# EAGLE board FT-991A_PAT (EAGLE 9.3.0)
REVISION_ID: U
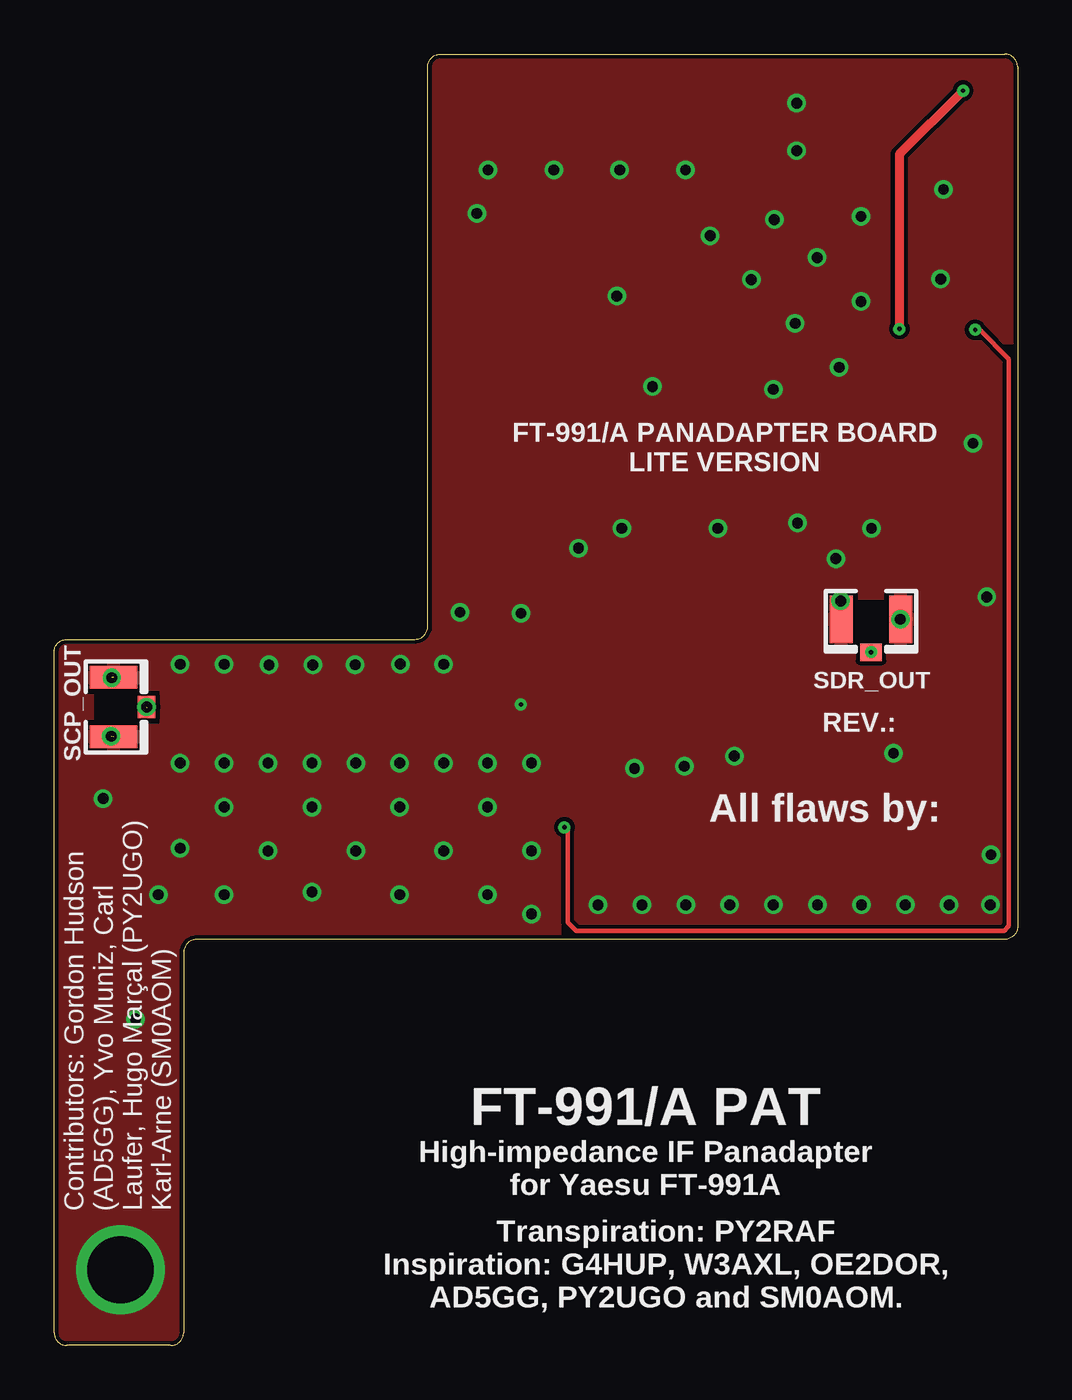
[diagram p0: board, top side]
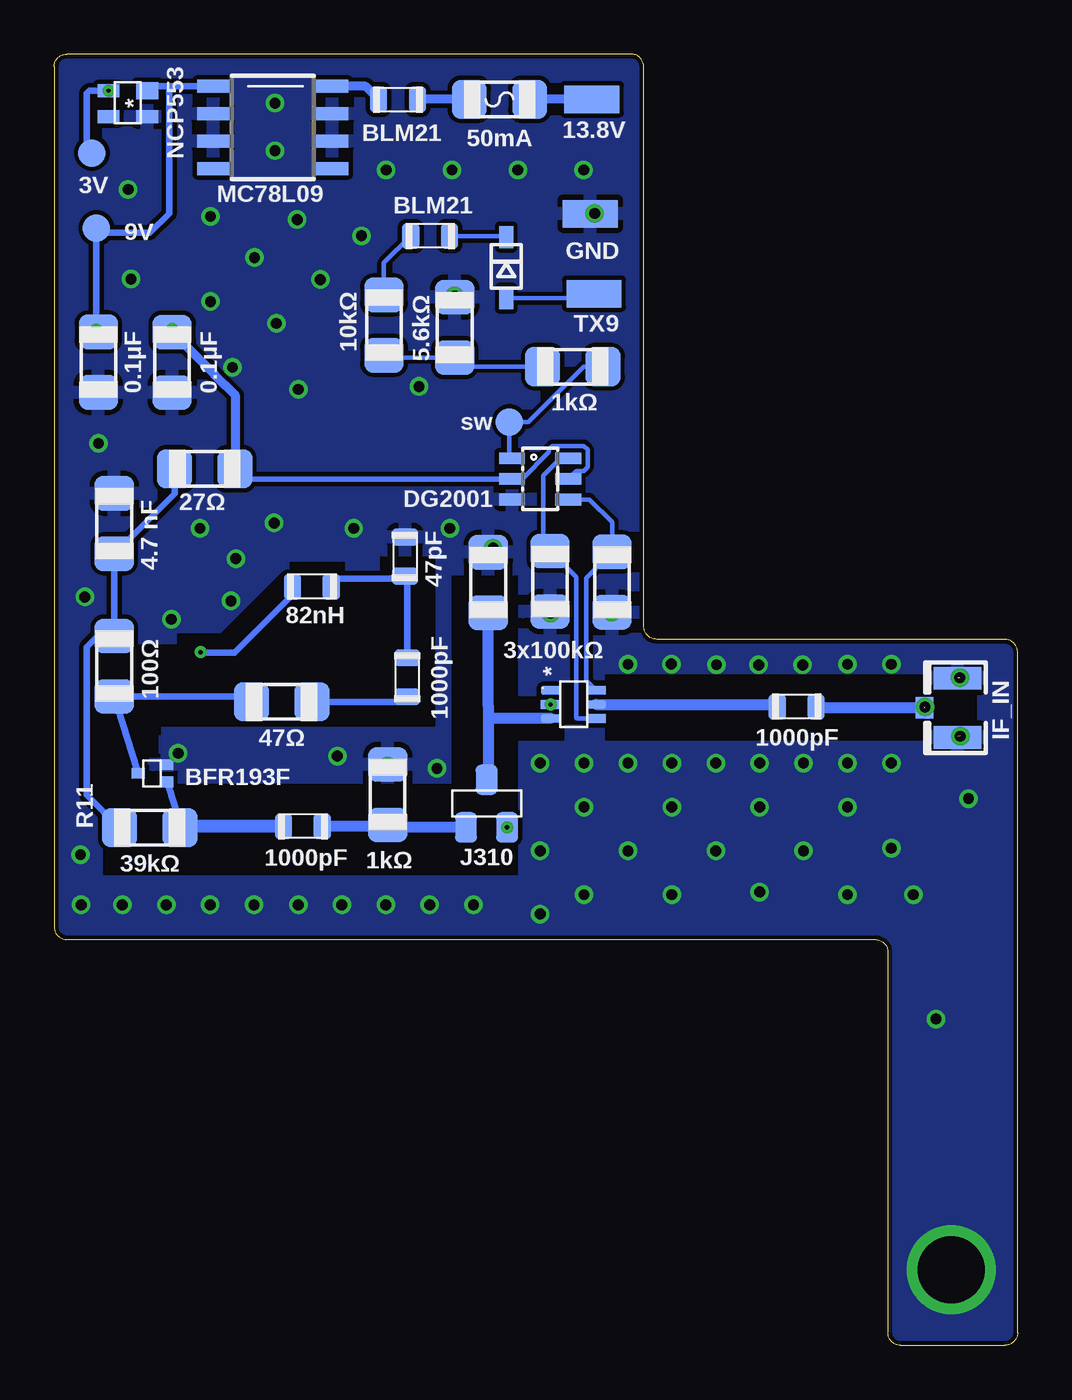
[diagram p1: board, bottom side, seen from below]

Size 44.6 x 59.8 mm. Coordinates in mm from the lower left corner, seen from the top.
Outline: 0,0.6 0,32.1 arc-90 0.6,32.7 16.7,32.7 arc90 17.3,33.3 17.3,59.2 arc-90 17.9,59.8 44,59.8 arc-90 44.6,59.2 44.6,19.4 arc-90 44,18.8 6.6,18.8 arc90 6,18.2 6,0.6 arc-90 5.4,0 0.6,0 arc-90 0,0.6
Copper layers (1*16): Top 0.0356mm / dielectric 1.6mm / Bottom 0.0356mm
Design rules "LaenPCBOrder *": minimum track width 5mil, minimum drill 0.2mm, track to track 8mil, track to pad 8mil, pad to pad 8mil, via to via 8mil, smd to smd 8mil, copper to edge 0.2mm, drill to drill 0.2mm, minimum pad ring 7mil, minimum via ring 7mil, stop-mask expansion 3mil, vias tented up to drill 10mil, thermal gap 10mil
tRestrict: area 3.7,28.8 to 4.9,30.3
bRestrict: area 3.7,28.8 to 4.9,30.3; area 23.1,21.8 to 42.3,26; area 23.1,25.9 to 26.2,35.6; area 21,28 to 23.5,30.1; area 4.1,28 to 19.1,31.1; area 27,28.7 to 29.5,30.7; area 27,30.8 to 29.5,32.8; area 27,32.8 to 29.5,34.9; area 27,34.5 to 29.5,36.5; area 31.1,34.2 to 33.7,36.3; area 32.7,32.5 to 35.9,35.7; area 33.9,31.2 to 37.2,34.5; 8 more areas; 1 lines

## Footprints (pad centres in the part's own frame; a part is rotated, then mirrored left to right if it is on the bottom)
SMD1,27-2,54 = smd 1.27 x 2.54: 1 0,0
0805 = smd 0.8 x 1.2: P$1 -0.9,0; P$2 0.9,0
1206 = smd 1.6 x 1.8: 1 -1.4,0; 2 1.4,0
SOD-323 = smd 1.016 x 0.635: A 1.481,0; C -1.354,0
FUSE-1206 = smd 1.6 x 1.8: 1 -1.4,0; 2 1.4,0
SC-70 = smd 0.4 x 0.9: 1 -0.635,-1.035; 2 0.015,-1.035; 3 0.665,-1.035; 4 0.665,1.065; 5 0.015,1.065; 6 -0.635,1.065
SOIC8 = smd 0.6 x 1.5: 1 -1.905,-2.75; 2 -0.635,-2.75; 3 0.635,-2.75; 4 1.905,-2.75; 5 1.905,2.75; 6 0.635,2.75; 7 -0.635,2.75; 8 -1.905,2.75
SOT23-6 = smd 0.55 x 1.2: 1 -0.95,-1.3; 2 0,-1.3; 3 0.95,-1.3; 4 0.95,1.3; 5 0,1.3; 6 -0.95,1.3
SC-82AB = smd 0.6 x 1.016: 1 -0.6,-0.9; 3 0.6,0.9; 4 -0.6,0.9 | smd 0.8 x 1.016: 2 0.6,-0.9
SOT23-3 = smd 1 x 1.4: 1 -0.95,-1.1; 2 0.95,-1.1; 3 0,1.1
TSFP-3 = smd 0.5 x 0.55: 1 -0.4,-0.7; 2 0.4,-0.7 | smd 0.5 x 0.6: 3 0,0.635
B1,27 = smd 1.27 x 1.27: TP 0,0
U.FL = smd 2.2 x 1.05: 1 0,1.375; 2 0,-1.375 | smd 0.8 x 1: 3 1.525,0

## Placement (x,y rotation side)
13.8V  13.8V  [SMD1,27-2,54]  19.7,57.7 270 bottom
C1  1000pF  [0805]  10.22,29.57 180 bottom
C2  0.1µF  [1206]  42.55,45.53 270 bottom
C3  0.1µF  [1206]  39.13,45.52 270 bottom
C11  1000pF  [0805]  33.08,24.03 180 bottom
C12  1000pF  [0805]  28.25,30.94 90 bottom
C13  4.7 nF  [1206]  41.81,38.05 90 bottom
C14  47pF  [0805]  28.35,36.53 270 bottom
D1  1SS355VM  [SOD-323]  23.67,49.97 270 bottom
F1  50mA  [FUSE-1206]  23.98,57.7 180 bottom
GND  GND  [SMD1,27-2,54]  19.78,52.4 270 bottom
L1  82nH  [0805]  32.67,35.13 180 bottom
L2  BLM21  [0805]  28.68,57.7 0 bottom
L3  BLM21  [0805]  27.19,51.36 180 bottom
PAD3  TX9  [SMD1,27-2,54]  19.61,48.7 90 bottom
Q1  PE4259  [SC-70]  20.58,29.7 270 bottom
Q2  MC78L09  [SOIC8]  34.48,56.4 270 bottom
Q3  DG2001  [SOT23-6]  22.1,40.13 270 bottom
Q5  NCP553  [SC-82AB]  41.18,57.5 90 bottom
Q7  J310  [SOT23-3]  24.58,25.1 0 bottom
Q8  BFR193F  [TSFP-3]  40.07,26.49 90 bottom
R1  100kΩ  [1206]  18.77,35.34 90 bottom
R2  1kΩ  [1206]  20.58,45.32 0 bottom
R3  10kΩ  [1206]  29.33,47.25 90 bottom
R4  5.6kΩ  [1206]  26.05,47.14 90 bottom
R5  100kΩ  [1206]  24.5,35.33 270 bottom
R6  100kΩ  [1206]  21.64,35.38 90 bottom
R7  1kΩ  [1206]  29.16,25.5 270 bottom
R11  39kΩ  [1206]  40.17,23.98 0 bottom
R12  100Ω  [1206]  41.81,31.45 270 bottom
R13  27Ω  [1206]  37.62,40.59 180 bottom
R14  47Ω  [1206]  34.06,29.8 0 bottom
TP1  9V  [B1,27]  42.64,51.74 0 bottom
TP2  3V  [B1,27]  42.84,55.21 0 bottom
TP3  3V  [B1,27]  23.52,42.76 0 bottom
X1  IF_IN  [U.FL]  2.78,29.53 180 bottom
X2  SCP_OUT  [U.FL]  2.76,29.56 0 top
X3  SDR_OUT  [U.FL]  37.82,33.63 270 top

## Library data of the parts
13.8V GND PAD3 = wirepad
C1-C3 C11-C14 D1 F1 L2 L3 Q1 Q3 Q5 Q7 Q8 R1-R7 R11-R14 = aarf
L1 = aarf; MODEL: LQW2BAN91NJ00L; SPICEPREFIX: L
Q2 = aarf; VOLTAGE: 9V
TP1-TP3 = testpad
X1-X3 = adafruit

## Nets
3V: C3.1 Q3.2 Q3.5 Q5.3 R13.1 TP2.TP
9V: C2.1 Q2.1 Q5.2 Q7.2 TP1.TP
FB-3V: C13.1 R11.1 R12.1 R13.2
FINAL: L1.P$2 X3.3
GNDA: C2.2 C3.2 C13.2 C14.P$1 GND.1 Q1.2 Q2.2 Q2.3 Q2.6 Q2.7 Q3.3 Q5.1 Q8.2 R1.1 R4.2 R5.1 R6.1 R7.1 X1.1 X1.2 X2.1 X2.2 X3.1 X3.2
IFTAP: C1.P$2 Q1.5
N$7: Q3.1 R2.2 TP3.TP
N$8: R2.1 R3.1 R4.1
N$18: D1.A PAD3.1
N$25: L3.P$2 R3.2
N$26: L2.P$1 Q2.8
N$28: 13.8V.1 F1.1
N$32: F1.2 L2.P$2
N$35: D1.C L3.P$1
NC: Q1.6 Q3.4 R1.2
NO: Q1.4 Q3.6 R6.2
RAWIN: C1.P$1 X1.3 X2.3
ST1IN: Q1.3 Q7.3 R5.2
ST1M1: C11.P$1 Q7.1 R7.2
ST2IN: C11.P$2 Q8.1 R11.2
ST2M1: C12.P$1 R14.2
ST2M2: C12.P$2 C14.P$2 L1.P$1
ST2OUT: Q8.3 R12.2 R14.1

## Tracks (layer width: path | path; a pad name or v marks a point on that pad's centre or on a via)
3V  (via drill 0.2)
  Top 0.2: C3.1 v39.13,47.07
  Top 0.406: Q5.3 39.13,55.15 v39.13,47.07
  Bottom 0.152: 42.97,55.34 TP2.TP
  Bottom 0.2: C3.1 v39.13,47.07
  Bottom 0.203: Q3.2 22.94,40.13 21.71,41.36 21.71,41.48 21.53,41.66 20.08,41.66 19.9,41.48 19.9,40.68 20.08,40.5 20.43,40.5 Q3.5
  Bottom 0.254: Q3.2 35.75,40.13 R13.1
  Bottom 0.305: Q5.3 42.98,58.1 43.08,57.99 43.08,55.45 42.97,55.34
  Bottom 0.406: R13.1 36.22,44.01 36.66,44.46 36.69,44.46 37.17,44.94 37.17,44.97 C3.1
  other vias: 42.08,58.1
9V  (via drill 0.2)
  Top 0.2: 44.2,45.67 44.2,19.42 43.98,19.2 24.17,19.2 23.78,19.6 23.78,23.85 Q7.2
  Top 0.203: 44.2,45.67 42.85,47.03 v42.64,47.03
  Bottom 0.2: 37.33,58.2 Q2.1
  Bottom 0.203: TP1.TP 42.64,51.52 | C2.1 v42.64,47.03
  Bottom 0.305: Q2.1 39.27,58.3 | 39.27,58.3 40.07,58.3 Q5.2 | 39.27,58.3 39.27,52.41 40.16,51.52 42.64,51.52 | TP1.TP v42.64,47.03
  other vias: 23.63,24
FB-3V
  Bottom 0.305: R11.1 43.08,25.49 43.08,32.34 42.57,32.85 R12.1 C13.1 39.02,39.45 R13.2
  Bottom 0.406: 41.82,32.86 R12.1
FINAL  (via drill 0.2)
  Bottom 0.254: 37.8,32.09 X3.3 | L1.P$2 33.57,34.75
  Bottom 0.305: 33.57,34.75 36.23,32.09 37.8,32.09
  other vias: 37.82,32.11
GNDA  (via drill 0.2, 0.5, 3.1)  (2 unrouted)
  other vias: 3.08,3.5 35.32,50.37 39.17,33.62 21.61,33.9 29.17,26.82 18.03,31.54 2.65,28.21 11.98,31.51 33.34,52.13 34.37,57.52 34.37,55.32 2.67,30.92 19.57,52.42 24.27,36.92 16.03,31.55 36.41,34.47 43.37,22.72 26.87,26.72 13.94,31.52 3.77,15.12 2.27,25.32 33.29,20.4 31.28,20.4 34.41,38.09 21.61,29.68 41.17,53.53 41.04,49.38 37.36,48.34 34.31,47.32 36.34,45.29 37.36,52.28 30.37,51.39 33.29,44.27 29.23,54.43 26.18,54.43 23.13,54.43 20.08,54.43 32.28,49.35 9.95,31.51 22.1,26.97 20.07,24.94 22.1,22.9 20.07,20.87 22.1,19.98 18.03,26.97 18.03,22.9 16,24.94 13.97,26.97 20.07,26.97 11.94,26.97 11.94,24.94 16,20.87 11.94,21 7.87,24.94 5.84,26.97 7.87,20.87 4.83,20.87 16,26.97 9.91,26.97 7.87,31.54 5.84,31.54 5.84,23.03 9.91,22.9 13.97,22.9 26.05,48.59 27.7,44.4 18.8,33.95 29.24,20.4 27.21,20.4 25.18,20.4 35.34,20.4 37.37,20.4 39.4,20.4 41.44,20.4 43.34,20.4 7.87,26.97 30.73,37.83 37.84,37.83 31.49,27.29 43.17,34.66 42.54,41.77 36.19,36.44 26.28,37.83 38.85,27.42
  pour Bottom: -0.56,33.94 16.58,33.94 16.58,61.88 45.16,61.88 45.16,16.16 7.38,16.48 7.06,-1.62 -0.56,-1.62
  pour Top: -0.56,33.94 16.58,33.94 16.58,61.88 45.16,61.88 45.16,16.16 7.06,16.16 7.06,-1.62 -0.56,-1.62
IFTAP
  Bottom 0.508: Q1.5 11.24,29.68 C1.P$2
N$7
  Bottom 0.203: TP3.TP 22.64,42.76 20.07,45.32 R2.2 | TP3.TP | TP3.TP 23.52,41.2 Q3.1
N$8
  Bottom 0.203: R4.1 26.18,45.74 | 26.18,45.74 29.22,45.74 R3.1 | R2.1 25.76,45.32 26.18,45.74
N$18
  Bottom 0.203: D1.A 19.82,48.49 PAD3.1
N$25
  Bottom 0.203: R3.2 29.33,50.13 L3.P$2
N$26
  Bottom 0.406: L2.P$1 30.18,58.3 Q2.8
N$28
  Bottom 0.406: 13.8V.1 F1.1
N$32
  Bottom 0.406: F1.2 L2.P$2
N$35
  Bottom 0.203: L3.P$1 23.71,51.36 D1.C
NC
  Bottom 0.203: Q3.4 19.82,39.18 18.77,38.13 R1.2 19.97,35.54 19.97,30.79 Q1.6
NO
  Bottom 0.203: Q1.4 20.41,29.03 20.43,29.05 20.43,35.58 R6.2 21.96,37.1 21.96,40.27 21.15,41.09 20.81,41.09 Q3.6
RAWIN  (via drill 0.5)  (1 unrouted)
  Bottom 0.508: X1.3 9.28,29.53 C1.P$1
  other vias: 4.29,29.56
ST1IN
  Bottom 0.406: Q7.3 24.5,26.27
  Bottom 0.508: R5.2 24.5,29.59 24.5,29 | 24.5,29 24.5,26.27 | Q1.3 24.47,29.03 24.5,29
ST1M1
  Bottom 0.406: 29.05,24 R7.2 29.22,24.03
  Bottom 0.508: Q7.1 29.05,24 | 29.22,24.03 C11.P$1
ST2IN
  Bottom 0.305: Q8.1 38.71,24.03
  Bottom 0.61: C11.P$2 38.71,24.03 R11.2
ST2M1
  Bottom 0.254: 32.66,29.69 R14.2 | 28.5,29.8 C12.P$1
  Bottom 0.305: R14.2 28.5,29.8
ST2M2
  Bottom 0.254: 28.25,35.53 C14.P$2
  Bottom 0.305: C12.P$2 28.25,35.53 | C14.P$2 28.48,35.5 31.65,35.5 31.77,35.39 L1.P$1
ST2OUT
  Bottom 0.254: 35.71,30.05 R14.1
  Bottom 0.305: 41.81,29.65 R12.2 | R12.2 35.71,30.05 | R12.2 Q8.3

## Text on the board
tPlace: FT-991/A PANADAPTER BOARD / LITE VERSION | REV.: | All flaws by: | FT-991/A PAT | High-impedance IF Panadapter / for Yaesu FT-991A | Contributors: Gordon Hudson / (AD5GG), Yvo Muniz, Carl / Laufer, Hugo Marçal (PY2UGO) / Karl-Arne (SM0AOM) | Transpiration: PY2RAF / Inspiration: G4HUP, W3AXL, OE2DOR, / AD5GG, PY2UGO and SM0AOM.
bPlace: 3V | 9V | sw | 3x100kΩ
tStop: Light / Ed | PY2RAF
bStop: VAI CORINTHIANS!